# Allegro board LinkingInterfaceV2_0.brd
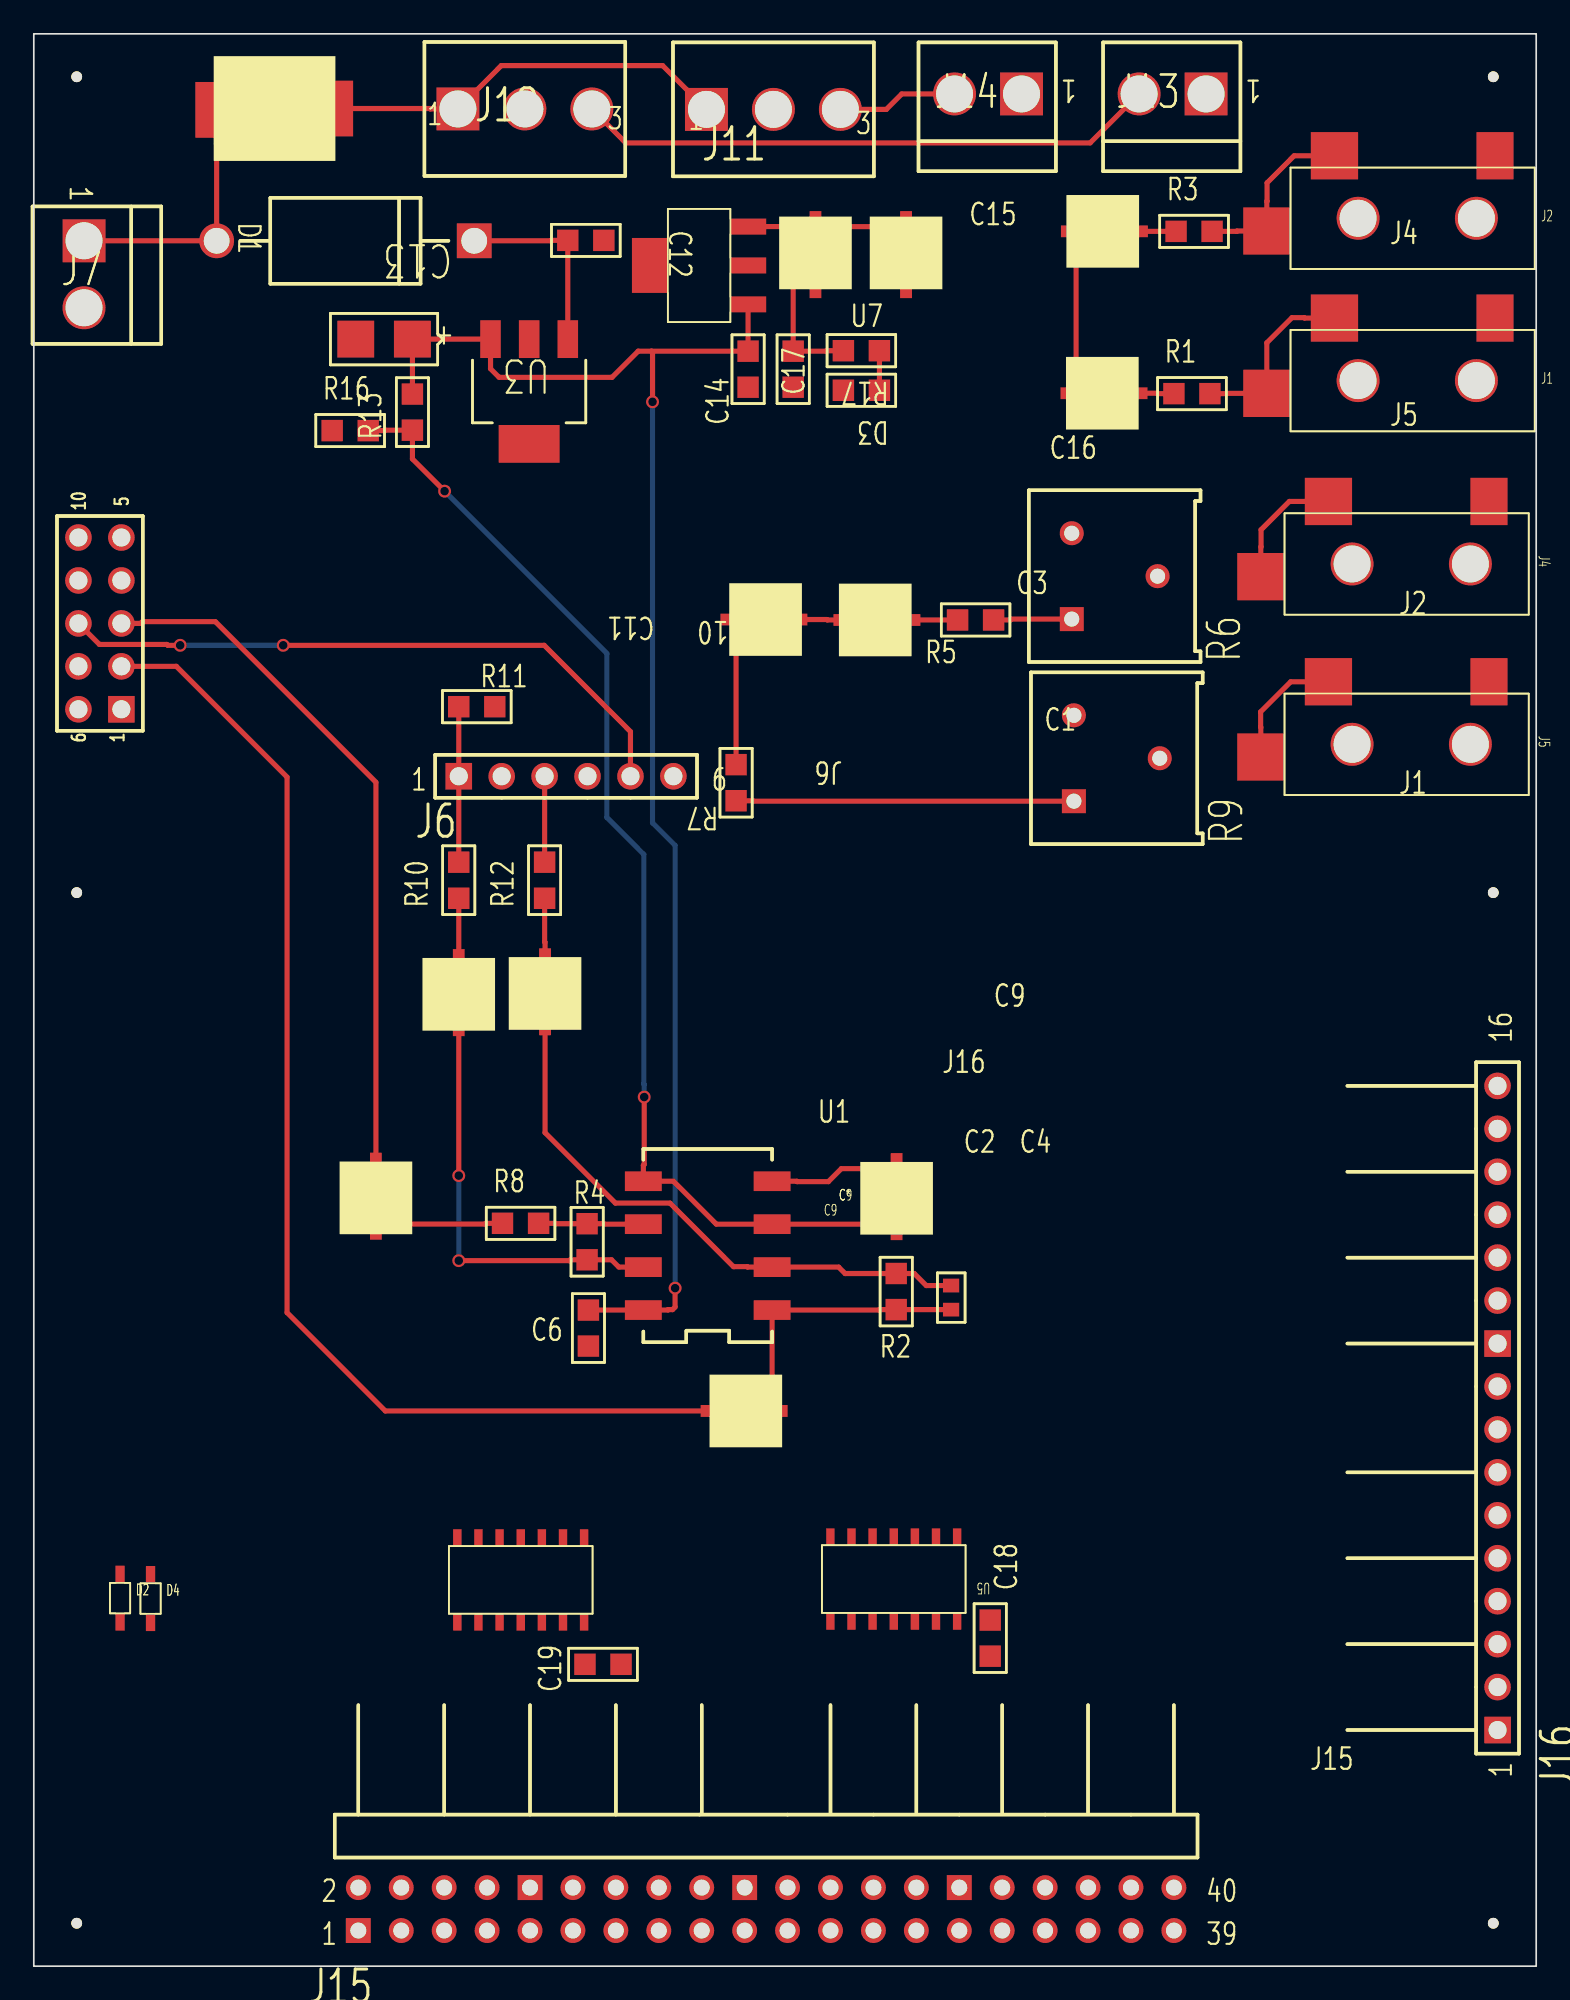
[diagram p0: board, top side]
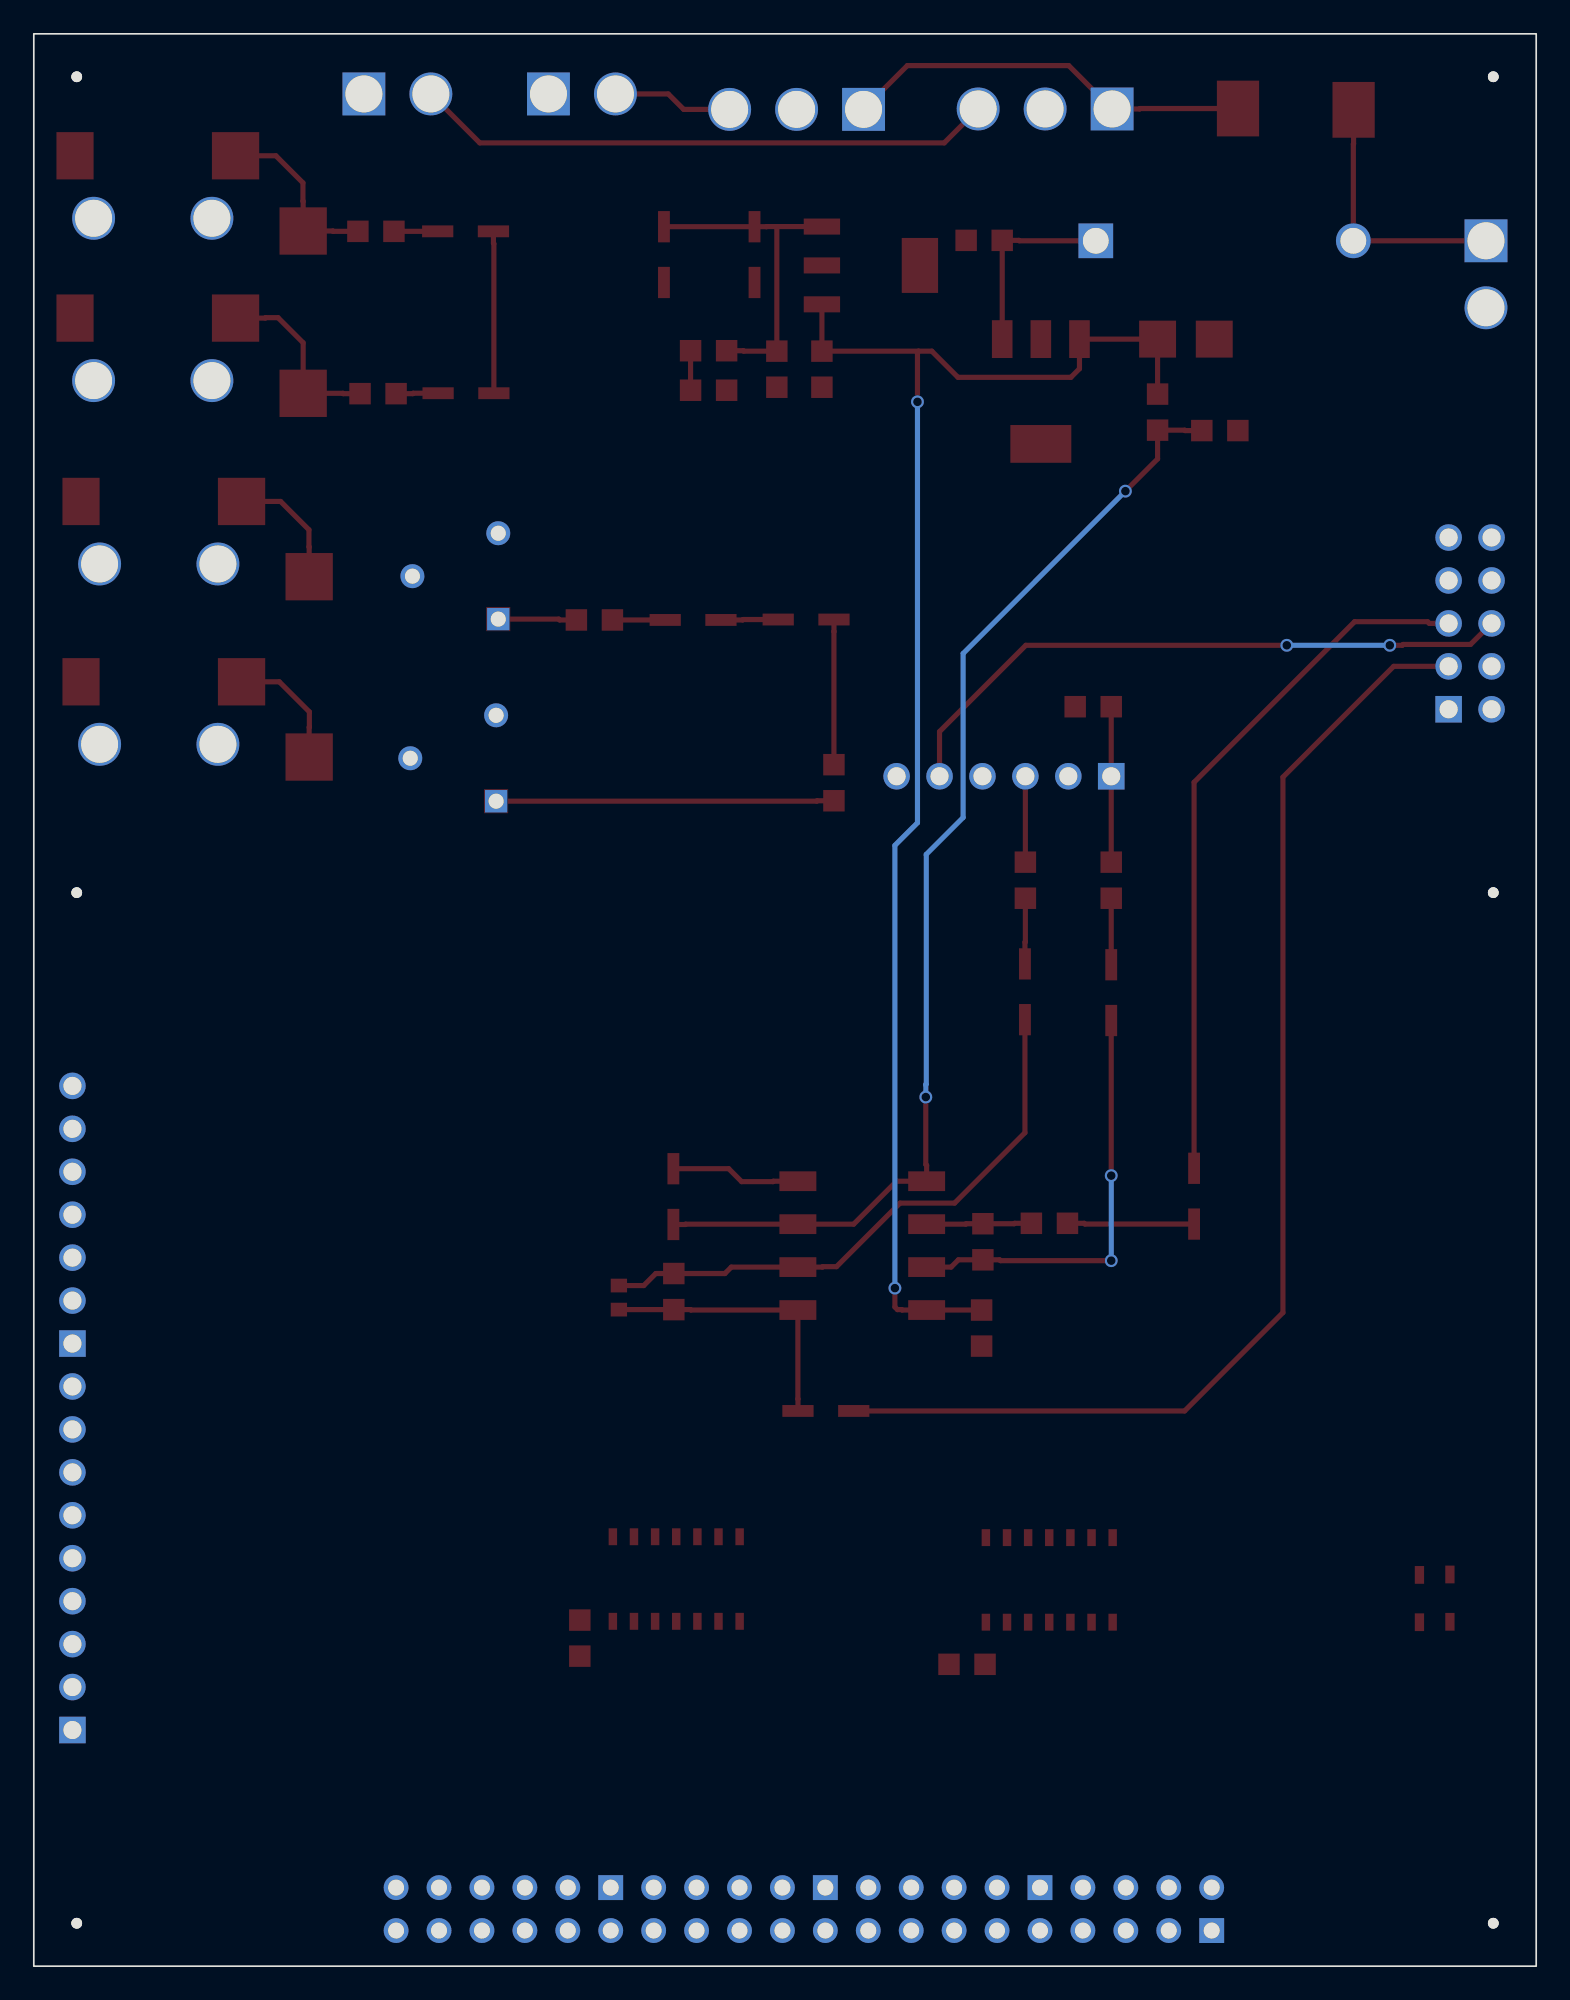
[diagram p1: board, bottom side, seen from below]

Outline 88.9 x 114.3 mm; copper layers: TOP, BOTTOM. Coordinates in mm from the lower left corner of the outline.
Outline path: rectangle 0,0 88.9,114.3

## Placement (name value [footprint] x y rotation side)
C1  10uF  [1_UF_CAP]  61.98 93.04 270 top
C2  100pF  [SMC0603]  54.28 38.84 90 top
C3  10uF  [1_UF_CAP]  62 102.62 270 top
C4  10uF  [1_UF_CAP]  43.38 32.84 90 top
C5  10uF  [1_UF_CAP]  48.54 79.63 270 top
C6  100nF  [SMC0805]  32.82 36.68 90 top
C7  1uF  [1_UF_CAP]  20.24 44.2 0 top
C8  10uF  [1_UF_CAP]  44.55 79.65 90 top
C9  4.7uF  [1_UF_CAP]  51.05 44.17 0 top
C10  10uF  [1_UF_CAP]  25.15 56.24 0 top
C11  10uF  [1_UF_CAP]  30.25 56.29 0 top
C12  470nF  [SMC0805]  31.6 102.08 0 top
C13  22uF/Tant  [EIAB_SMCT3528_12]  22.4 96.24 180 top
C14  100nF  [SMC0805]  42.27 93.4 90 top
C15  10uF  [1_UF_CAP]  46.25 102.59 180 top
C16  10uF  [1_UF_CAP]  51.61 102.59 180 top
C17  100nF  [SMC0805]  44.93 93.4 90 top
C18  100nF  [SMC0805]  56.59 18.34 90 top
C19  100nF  [SMC0805]  32.61 17.86 0 top
D1  SB1245  [DAX600_60D]  10.82 102.06 0 top
D2  1N4148  [1N4148_SOD523]  5.11 20.37 0 top
D3  RED  [SMR0805]  50.04 93.22 180 top
D4  1N4148  [1N4148_SOD523]  6.91 20.35 0 top
D5  -  [B320]  10.85 109.88 0 top
J1  TX_Echo  [35MMJACK]  86.51 97.54 0 top
J2  TX_Allstar  [35MMJACK]  86.51 107.14 0 top
J4  RX_Echo  [35MMJACK]  86.16 86.69 0 top
J5  Rx_Allstar  [35MMJACK]  86.16 76.02 0 top
J6  HEADER 6  [BLKCON100VHTM1SQSW1006]  25.15 70.38 0 top
J7  0.156 VH  [BLKCON156_VHTM1SQ_SW156_2]  2.97 102.06 270 top
J11  HEADER 3  [BLKCON156VHTM1SQSW3123]  39.8 109.83 0 top
J12  HEADER 3  [BLKCON156VHTM1SQSW3123]  25.1 109.85 0 top
J13  0.156 VH  [BLKCON156_VHTM1SQ_SW156_2]  69.37 110.74 180 top
J14  0.156 VH  [BLKCON156_VHTM1SQ_SW156_2]  58.45 110.74 180 top
J15  HEADER 20X2  [BLKCON100RHTM2OEW52540]  19.2 2.11 0 top
J16  HEADER 16  [BLKCON100RHTM1SQSW35016]  86.61 13.97 90 top
J17  HEADER 9  [BCON2DB9_5X2V_100S_42D]  5.18 74.35 90 top
NOREF  -  [unnamed]  2.54 63.5 180 bottom
NOREF#2  -  [unnamed]  2.54 111.76 180 bottom
NOREF#3  -  [unnamed]  86.36 2.54 180 bottom
NOREF#4  -  [unnamed]  86.36 63.5 180 bottom
NOREF#5  -  [unnamed]  2.54 2.54 180 bottom
NOREF#6  -  [unnamed]  86.36 111.76 180 bottom
R1  51k  [SMR0805]  67.46 93.01 0 top
R2  51k  [SMR0805]  51.03 38.84 90 top
R3  51k  [SMR0805]  67.59 102.62 0 top
R4  51k  [SMR0805]  32.74 43.92 270 top
R5  7.5k  [SMR0805]  54.66 79.63 0 top
R6  10k  [VRES18_35D]  63.96 82.22 90 top
R7  7.5k  [SMR0805]  41.55 71.07 270 top
R8  51k  [SMR0805]  27.74 43.94 0 top
R9  10k  [VRES18_35D]  64.08 71.45 90 top
R10  7.5k  [SMR0805]  25.15 63.17 90 top
R11  10k  [SMR0805]  27.28 74.5 180 top
R12  51k  [SMR0805]  30.23 63.17 90 top
R13  51k  [SMR0805]  22.4 90.86 90 top
R16  51k  [SMR0805]  17.65 90.83 0 top
R17  47  [SMR0805]  50.04 95.55 180 top
U1  TL072  [DIP100B8W300L450]  43.69 38.81 90 top
U3  LM2940 / SOT223  LDO  [SOT223_1234]  31.6 96.24 180 top
U5  74HC08  [74HC0]  54.64 25.4 180 top
U6  74HC04  [74HC0]  32.56 25.35 180 top
U7  LM2936/SO_5  [LM2936_SOT]  42.32 98.3 90 top

## Library data of the parts
C1 C3 C7 C11 = CAPACITOR POL
C2 C6 C12 C14 C17-C19 = C NP
C4 C5 C8-C10 C15 C16 = CAP POL
C13 = C POL
D1 D5 = DIODE SCHOTTKY_0
D2 D4 = 1N4148
D3 = LED
J1 J2 J4 J5 = PHONE JACK-3_2
J6 = HEADER 6
J7 J13 J14 = HEADER 2_4
J11 J12 = HEADER 3
J15 = HEADER 20X2
J16 = HEADER 16
J17 = HEADER 9
R1-R5 R7 R8 R10-R13 R16 R17 = RESISTOR
R6 R9 = POT
U1 = TL072_0
U3 = 78L05/TO92_0
U5 = 74HC08_4
U6 = 74HC04_5
U7 = LM2936/SO_13

## Footprints (pads in the part's own frame, mm; a bottom-side part is the same pattern mirrored in y, then rotated)
1_UF_CAP
  rect 0.701x1.849 smd: 1(0,-0.3) 2(0,3)
1N4148_SOD523
  rect 0.551x1.049 smd: 1(0,0) 2(0,2.799)
35MMJACK
  round 2.54 hole 2.184: (-8.151,-3.749) (-1.151,-3.749)
  rect 2.2x2.799 smd: 1(-0.051,-0.051)
  rect 2.799x2.799 smd: 2(-9.55,-0.051) 3(-13.551,-4.501)
74HC0
  rect 0.5x1.001 smd: 1(0,0) 2(1.25,0) 3(2.499,0) 4(3.749,0) 5(5.001,0) 6(6.251,0) 7(7.501,0) 8(7.501,5.001) 9(6.251,5.001) 10(5.001,5.001) 11(3.749,5.001) 12(2.499,5.001) 13(1.25,5.001) 14(0,5.001)
B320
  rect 2.499x3.299 smd: 1(-0.041,-0.079) 2(6.8,0)
BCON2DB9_5X2V_100S_42D
  round 1.575 hole 1.067: (10.16,2.54) 2(2.54,0) 3(5.08,0) 4(7.62,0) 5(10.16,0) 6(0,2.54) 7(2.54,2.54) 8(5.08,2.54) 9(7.62,2.54)
  rect 1.575x1.575 hole 1.067: 1(0,0)
BLKCON100RHTM1SQSW35016
  rect 1.575x1.575 hole 1.067: 1(0,0) 10(22.86,0)
  round 1.575 hole 1.067: 2(2.54,0) 3(5.08,0) 4(7.62,0) 5(10.16,0) 6(12.7,0) 7(15.24,0) 8(17.78,0) 9(20.32,0) 11(25.4,0) 12(27.94,0) 13(30.48,0) 14(33.02,0) 15(35.56,0) 16(38.1,0)
BLKCON100RHTM2OEW52540
  rect 1.473x1.473 hole 0.94: 1(0,0) 10(10.16,2.54) 20(22.86,2.54) 30(35.56,2.54)
  round 1.473 hole 0.94: 2(0,2.54) 3(2.54,0) 4(2.54,2.54) 5(5.08,0) 6(5.08,2.54) 7(7.62,0) 8(7.62,2.54) 9(10.16,0) 11(12.7,0) 12(12.7,2.54) 13(15.24,0) 14(15.24,2.54) 15(17.78,0) 16(17.78,2.54) 17(20.32,0) 18(20.32,2.54) 19(22.86,0) 21(25.4,0) 22(25.4,2.54) 23(27.94,0) 24(27.94,2.54) 25(30.48,0) 26(30.48,2.54) 27(33.02,0) 28(33.02,2.54) 29(35.56,0) 31(38.1,0) 32(38.1,2.54) 33(40.64,0) 34(40.64,2.54) 35(43.18,0) 36(43.18,2.54) 37(45.72,0) 38(45.72,2.54) 39(48.26,0) 40(48.26,2.54)
BLKCON100VHTM1SQSW1006
  rect 1.575x1.575 hole 1.067: 1(0,0)
  round 1.575 hole 1.067: 2(2.54,0) 3(5.08,0) 4(7.62,0) 5(10.16,0) 6(12.7,0)
BLKCON156_VHTM1SQ_SW156_2
  rect 2.54x2.54 hole 2.184: 1(0,0)
  round 2.54 hole 2.184: 2(3.962,0)
BLKCON156VHTM1SQSW3123
  rect 2.54x2.54 hole 2.184: 1(0,0)
  round 2.54 hole 2.184: 2(3.962,0) 3(7.925,0)
DAX600_60D
  round 2.057 hole 1.524: 1(0,0)
  rect 2.057x2.057 hole 1.524: 2(15.24,0)
DIP100B8W300L450
  rect 1.168x2.184 smd: 1(0,0) 2(2.54,0) 3(5.08,0) 4(7.62,0) 5(7.62,7.62) 6(5.08,7.62) 7(2.54,7.62) 8(0,7.62)
EIAB_SMCT3528_12
  rect 2.184x2.184 smd: 1(0,0) 2(3.353,0)
LM2936_SOT
  rect 0.95x2.149 smd: 1(0,0.051) 2(2.301,0.051) 3(4.6,0.051)
  rect 3.251x2.149 smd: 4(2.301,5.85)
SMC0603
  rect 0.813x0.965 smd: 1(0,0) 2(1.422,0)
SMC0805
  rect 1.27x1.27 smd: 1(0,0) 2(2.134,0)
SMR0805
  rect 1.27x1.27 smd: 1(0,0) 2(2.134,0)
SOT223_1234
  rect 1.219x2.235 smd: 1(0,0) 2(2.286,0) 3(4.572,0)
  rect 3.607x2.235 smd: 4(2.286,6.198)
unnamed
  round 0.635 hole 3.175 unplated: (0,0)
VRES18_35D
  rect 1.422x1.422 hole 0.889: 1(-2.54,2.54)
  round 1.422 hole 0.889: 2(0,-2.54) 3(2.54,2.54)

## Nets
+3.3V: C15.1 C16.1 C17.2(B) C18.2(B) C19.1(A) R17.2 U5.14(+3.3V) U6.14(+3.3V) U7.3(+3.3V)
+4.5V: C9.1 R13.1 R16.2 U1.3(+IN) U1.5(+IN)
+9V: C6.2(B) C13.1(P) C14.2(B) R13.2 U1.8(+9V) U3.3(+9V) U7.1(+9V)
GND: C6.1(A) C9.2 C12.2(B) C13.2(N) C14.1(A) C15.2 C16.2 C17.1(A) C18.1(A) C19.2(B) D3.2(CATHODE) J1.1 J2.1 J4.1 J5.1 J6.2 J6.4 J6.6 J7.2 J11.2 J12.2 J13.1 J14.1 J15.2 J16.16 J17.1 J17.4 J17.6 J17.7 R6.3(B) R9.3(B) R11.1 R16.1 U1.4(GND) U3.2(G1) U3.4(G2) U5.7(GND) U6.7(GND) U7.2(GND#2) U7.4(GND#4)
AUDIO_AUX: C7.2 J17.3
AUDIOOUT: C4.2 J17.2
COS: D2.2 D4.2 J17.5
COS_ALLSTAR: D4.1 J16.2
DTMF_AUDIO: J6.1 R10.2 R11.2
DTMF_TONE_CONFIRMATION: J6.3 R12.2
INHIBIT: J6.5 J17.8
PTT: J17.9 U5.3(Y)
PTT_A: J16.1 U5.1(A) U6.1(A)
PTT_E: J15.30 U5.2(B) U5.4(A) U6.3(A)
RX_A: J5.2 J5.3 R9.2(WIPER)
RX_E: J4.2 J4.3 R6.2(WIPER)
TX_A: J2.2 J2.3 R3.2
N88559: C1.1 C2.2(B) C3.1 C11.1 R2.2 U1.2(-IN)
N88575: C2.1(A) C4.1 R2.1 U1.1(OUT)
N89923: C5.1 C8.1 C10.1 R4.2 U1.7(OUT)
N90145: C1.2 R1.1
N90149: C3.2 R3.1
N90849: R4.1 R8.2 U1.6(-IN)
N96497: J15.34 U5.6(Y)
N134507: C5.2 R5.1
N134567: C10.2 R10.1
N134575: C8.2 R7.1
N134810: R5.2 R6.1(A)
N196050: J1.2 J1.3 R1.2
N904010: R7.2 R9.1(A)
N908810: C7.1 R8.1
N14521945: C12.1(A) D1.2(CATHODE) U3.1(IN)
N14538770: D1.1(ANODE) D5.1(ANODE) J7.1
N14545130: J16.3 U6.4(Y)
N14551484: D2.1 J15.28
N14551658: C11.2 R12.1
N14597991: U5.5(B) U6.2(Y)
N14601468: D5.2(CATHODE) J11.1 J12.1
N14603309: J11.3 J14.2
N14603313: J12.3 J13.2
N145714160: D3.1(ANODE) R17.1

Pads without a net: J15 1 3 4 5 6 7 8 9 10 11 12 13 14 15 16 17 18 19 20 21 22 23 24 25 26 27 29 31 32 33 35 36 37 38 39 40; J16 4 5 6 7 8 9 10 11 12 13 14 15; U5 8 9 10 11 12 13; U6 5 6 8 9 10 11 12 13

## Via types
v1: diameter 0.762, hole 0.508, TOP to BOTTOM, 8 vias

## Routing (per net, layer and track width the routed paths; a pad name or vN(x,y) marks a point on that pad's centre or on a via; arc(x,y) is an arc through that point)
+3.3V: length 19.7
  TOP w0.305: 44.96,102.9 44.93,102.87 C17.2 46.89,95.53 46.91,95.55 R17.2 ; 44.96,102.9 U7.3 ; 44.96,102.9 45.54,102.9 45.55,102.89 C15.1 C16.1
+4.5V: length 68.8
  TOP w0.305: C9.1 50.35,43.87 50.33,43.89 U1.3 40.39,43.89 37.85,46.43 U1.5 36.07,47.37 36.12,47.42 v1(36.12,51.41) ; v1(24.31,87.25) 22.4,89.15 R13.1 20.8,90.86 20.78,90.83 R16.2
  BOTTOM w0.305: v1(24.31,87.25) 33.91,77.65 33.91,67.94 36.09,65.76 36.09,52.17 36.12,52.15 v1(36.12,51.41)
+9V: length 90.8
  TOP w0.305: v1(36.61,92.53) 36.61,95.47 36.55,95.53 ; 36.55,95.53 C14.2 U7.1 ; 36.55,95.53 35.76,95.53 34.21,93.98 27.53,93.98 27.03,94.49 U3.3 C13.1 R13.2 ; v1(37.95,40.11) 37.95,38.99 37.8,38.84 37.54,38.84 37.52,38.81 U1.8 C6.2
  BOTTOM w0.305: v1(36.61,92.53) 36.61,67.63 37.95,66.29 v1(37.95,40.11)
GND: length 7.7
  TOP w0.305: C9.2 47.78,47.17 47.02,46.41 45.16,46.41 45.14,46.43 U1.4
AUDIO_AUX: length 41.9
  TOP w0.305: J17.3 6.32,79.43 6.43,79.53 10.74,79.53 20.24,70.03 C7.2
AUDIOOUT: length 72
  TOP w0.305: J17.2 8.43,76.89 14.99,70.33 14.99,38.66 20.8,32.84 C4.2
DTMF_AUDIO: length 9.2
  TOP w0.305: R11.2 J6.1 R10.2
DTMF_TONE_CONFIRMATION: length 5.1
  TOP w0.305: R12.2 J6.3
INHIBIT: length 38
  TOP w0.305: v1(8.66,78.13) 7.92,78.13 7.87,78.18 3.89,78.18 J17.8 ; v1(14.76,78.13) 30.2,78.13 35.31,73.03 J6.5
  BOTTOM w0.305: v1(8.66,78.13) v1(14.76,78.13)
RX_A: length 7.4
  TOP w0.305: J5.3 72.61,73.28 72.59,73.29 72.59,74.19 74.37,75.97 J5.2
RX_E: length 7.5
  TOP w0.305: J4.3 72.61,83.94 72.62,83.96 72.62,84.96 74.3,86.64 J4.2
TX_A: length 10.8
  TOP w0.305: J2.2 74.57,107.09 72.97,105.49 72.97,104.4 72.96,104.39 J2.3 71.21,102.64 71.19,102.62 R3.2
N88559: length 44
  TOP w0.305: C3.1 61.7,101.91 61.68,101.88 C1.1 ; C11.1 30.25,49.3 34.42,45.14 37.64,45.14 41.4,41.38 42.21,41.38 42.24,41.35 U1.2 47.62,41.35 48.01,40.97 R2.2 52.1,40.97 52.81,40.26 C2.2
N88575: length 16.6
  TOP w0.305: C2.1 R2.1 50.04,38.84 50.01,38.81 U1.1 43.69,33.55 43.68,33.55 C4.1
N89923: length 28.7
  TOP w0.305: C8.1 46.93,79.65 46.96,79.63 C5.1 ; v1(25.15,41.73) 31.7,41.73 31.75,41.78 R4.2 34.19,41.78 34.62,41.35 U1.7 ; C10.1 v1(25.15,46.76)
  BOTTOM w0.305: v1(25.15,46.76) v1(25.15,41.73)
N90145: length 2.5
  TOP w0.305: R1.1 66.47,93.01 66.45,93.04 C1.2
N90149: length 2.6
  TOP w0.305: R3.1 C3.2
N90849: length 6.2
  TOP w0.305: U1.6 33.76,43.89 33.73,43.92 R4.1 30.89,43.92 30.86,43.94 R8.2
N134507: length 3.1
  TOP w0.305: C5.2 R5.1
N134567: length 3.9
  TOP w0.305: C10.2 R10.1
N134575: length 8.6
  TOP w0.305: C8.2 41.55,78.95 41.55,78.95 R7.1
N134810: length 4.6
  TOP w0.305: R5.2 57.79,79.63 57.84,79.68 R6.1
N196050: length 11
  TOP w0.305: R1.2 70.59,93.01 70.61,93.04 J1.3 72.96,96.02 74.45,97.51 75.18,97.51 75.21,97.49 J1.2
N904010: length 20
  TOP w0.305: R9.1 42.57,68.91 42.55,68.94 R7.2
N908810: length 7.5
  TOP w0.305: C7.1 26.7,43.9 26.75,43.94 R8.1
N14521945: length 11.4
  TOP w0.305: U3.1 C12.1 30.61,102.08 30.58,102.06 D1.2
N14538770: length 15.6
  TOP w0.305: D5.1 10.81,107.8 10.82,107.78 D1.1 J7.1
N14551658: length 3.9
  TOP w0.305: R12.1 30.23,60.59 30.25,60.57 C11.2
N14601468: length 24.3
  TOP w0.305: J11.1 37.21,112.42 27.66,112.42 J12.1 23.47,109.85 23.44,109.88 D5.2
N14603309: length 7.1
  TOP w0.305: J14.2 51.36,110.74 50.44,109.83 J11.3
N14603313: length 34.4
  TOP w0.305: J13.2 62.51,107.85 35.03,107.85 J12.3
N145714160: length 2.3
  TOP w0.305: R17.1 D3.1

## Text on the board
Board Geometry/Soldermask Bottom: SMB
Ref Des/Silkscreen Bottom: SSB
TOP: TOP
Board Geometry/Soldermask Top: SMT
Ref Des/Silkscreen Top: D4 | D2 | U5 | C7 | U1 | U7 | J16 | C2 | C15 | C9 | C3 | C4 | C1 | C16 | J15 | J4 | J5 | J2 | J1 | C5 | C8 | C11 | C10 | J6 | U6 | SST
User.5: BOTTOM
User.6: MECH
